# Altium PCB 12v to 5v_Regulator.PcbDoc
Units mil, origin at the board's own origin, x right, y up, seen from the top; angles counter-clockwise.
Board outline 1438.59 x 926.78 mil, 2 copper layers (Top Layer, Bottom Layer); 5 components, 3 nets, 17 pads, 4 vias.
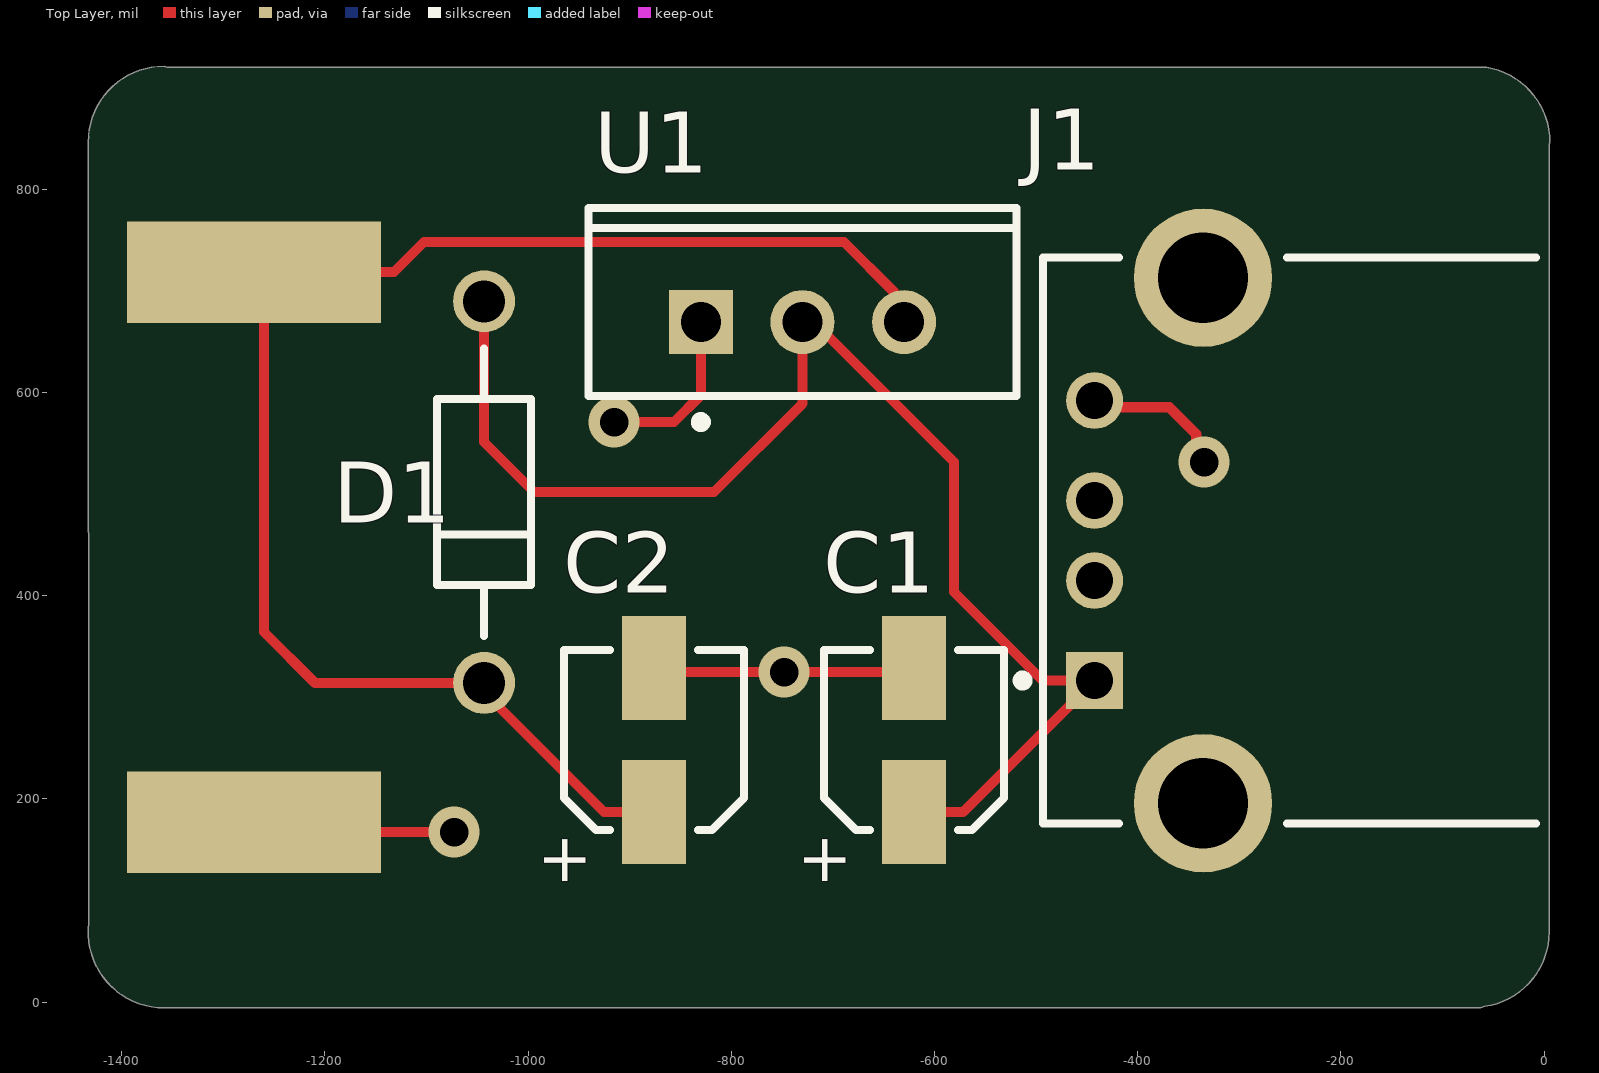
[diagram p0: Top Layer view]
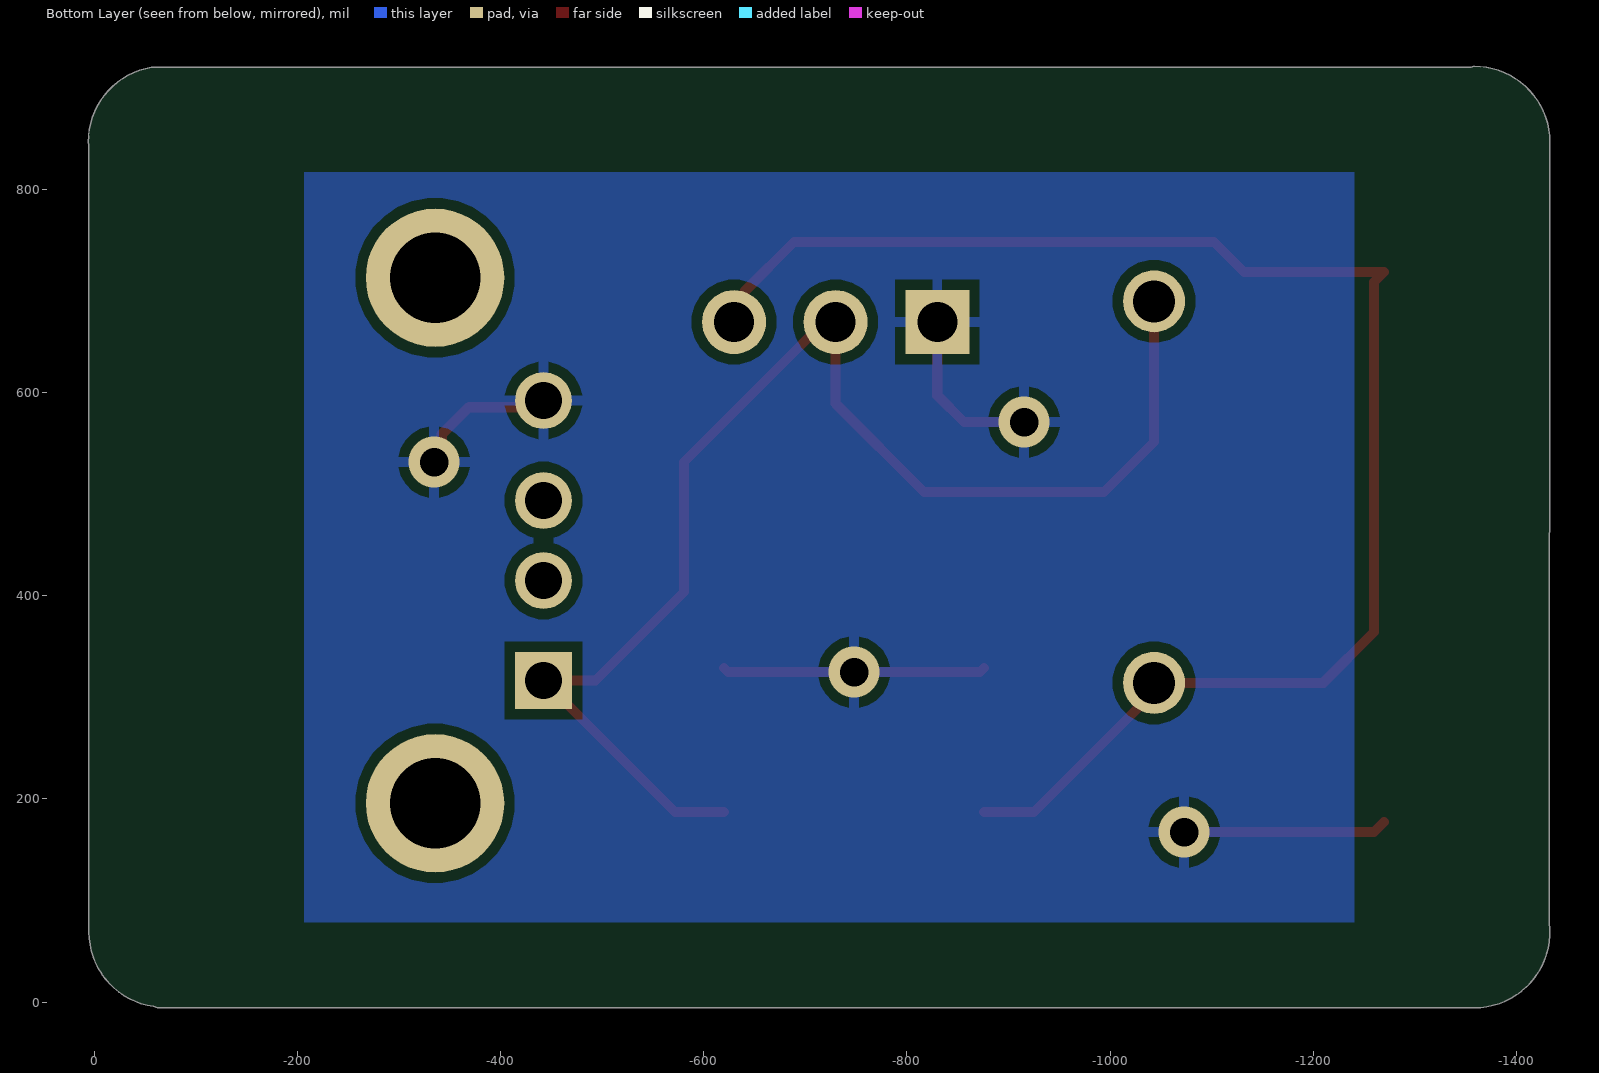
[diagram p1: Bottom Layer view, seen from below]

## Layer stack, top to bottom
Top Solder: solder mask 0.4, Solder Resist, Dk 3.5
Top Layer: signal copper 1.4
Dielectric 1: dielectric 12.6, FR-4, Dk 4.8
Bottom Layer: signal copper 1.4
Bottom Solder: solder mask 0.4, Solder Resist, Dk 3.5

## Board outline
-1432.31,78.11 ccw(c-1358.27,68.9) -1358.27,-5.71 -62.51,-5.71 -58.44,-4.27 ccw(c-68.9,68.9) 5.02,68.9 5.02,843.9 5.71,846.46 ccw(c-68.9,846.46) -56.63,920.05 -57.46,920.12 -1355.33,920.12 -1358.27,921.07 ccw(c-1358.27,846.46) -1432.88,846.46

## Design rules (kind name [scope] priority, off if disabled: settings)
Clearance Clearance_3 [All] p1: gap=5 ignorepadtopadclearanceinfootprint=FALSE
Clearance Clearance_2 [All] p2: gap=5 ignorepadtopadclearanceinfootprint=FALSE
Clearance Clearance_1 [All] p3: gap=5 ignorepadtopadclearanceinfootprint=FALSE
Clearance [All] p4: gap=5 ignorepadtopadclearanceinfootprint=FALSE
PolygonConnect [All] p1: connectstyle=Relief reliefconductorwidth=10 reliefentries=4 polygonreliefangle="90 Angle" airgapwidth=10
RoutingVias [All] p1: holewidth=28 width=50 viastyle="Through Hole" minholewidth=28 minwidth=50 maxholewidth=28 maxwidth=50
SilkToSolderMaskClearance [IsPad] p1 off: minsilkscreentomaskgap=10 clearancetoexposedcopper=TRUE
SolderMaskExpansion [All] p1: expansion=4 istentingtop=FALSE
SupplyNets "Schematic Supply Nets_2" [InNet('+12')] p1: voltage=0.000
SupplyNets "Schematic Supply Nets_1" [InNet('+5')] p2: voltage=0.000
SupplyNets "Schematic Supply Nets" [InNet('GND')] p3: voltage=0.000
UnRoutedNet [All] p1: checkbadconnections=TRUE
Width [All] p1: maxlimit=10 minlimit=10 preferedwidth=10
27 further rules are at their usual default settings.

## Components (designator, comment, footprint, x,y, rotation, side; value= is the part's Value field where it differs from the comment)
C1 "10uF" WCAP-ASLI_D4H5.5 49379.92,-49742.13 r270 top
C2 "10uF" WCAP-ASLI_D4H5.5 49124.02,-49742.13 r270 top
D1 "1N4002RLG" ONSC-AXIAL_LEAD-2-59-10_P -1043.31,501.97 r90 top
J1 "USB1130-15-A" FP-USB1130-15-A-MFG -209.69,454.25 r90 top
U1 "LM1085IT-5.0/NOPB" NDE0003A -729.92,669.29 r0 top

## Footprints (in the part's own frame and the unit in brackets; to place one, negate y for a bottom-side part, rotate by r counter-clockwise, add the part's x,y. Pads: shape width x height; smd on the part's side, far side on the other; paste and mask are expansions set on the pad)
FP-USB1130-15-A-MFG [mm]
  rect 1.42x1.42 hole 0.92 paste-2539.97 mask+0: 1(-3.5,5.91)
  round 1.42 hole 0.92 paste-2539.97 mask+0: 2(-1,5.91) 3(1,5.91) 4(3.5,5.91)
  round 3.46 hole 2.26 paste-2539.97 mask+0: 5(-6.57,3.2) 6(6.57,3.2)
  silkscreen extent -7.07,-5.13 7.07,7.83, body extent -8.4,-7.3 8.4,7.3, height 0.25
NDE0003A [mm] "FM, 3-Leads, Body 10.7x4.7mm, Pitch 2.54mm"
  rect 1.6x1.6 hole 1: 1(-2.54,0)
  round 1.6 hole 1: 2(0,0) 3(2.54,0)
  silkscreen extent -5.35,-2.62 5.35,2.85, body extent -5.4,-1.9 5.4,2.9, height 19.4
ONSC-AXIAL_LEAD-2-59-10_P [mm] "AXIAL, 2-Leads, Diameter 2.35mm"
  round 1.55 hole 1.05: 1(-4.77,0) 2(4.77,0)
  silkscreen extent -3.59,-1.17 3.59,1.17
WCAP-ASLI_D4H5.5 [mm] "Aluminium Electrolytic V-Chip SMT Capacitors, 4x5.5mm"
  rect 2.6x1.6 smd: 1(-1268.2,-1270) 2(-1271.8,-1270)
  silkscreen extent -1272.25,-1272.25 -1267.75,-1267.75, body extent -1272.5,-1272.15 -1267.5,-1267.85, height 5.5

## Part data
C1 C2: library part CMP-03913-53914566-2, "WCAP-ASLI Aluminum Electrolytic Capacitors", Capacitance=10µF, Case/Package=Radial, ESR (Equivalent Series Resistance)=1.66693Ω, Insulation Resistance=5.33333MΩ, Leakage Current=3µA, Max Operating Temperature=105°C, Min Operating Temperature=-55°C, Ripple Current=80mA, Tolerance=20%, Voltage Rating=16V, Diameter=4mm, Height=5.5mm, Height - Seated (Max)=5.5118mm, Impedance=2.2Ω, Lead Free="Lead Free", Length=5.5mm, Life (Hours)=2000hours, Mount="Surface Mount", Polarity=Polar, REACH SVHC=Unknown, Ripple Current (AC)=80mA, RoHS=Compliant, Voltage Rating (DC)=16V, Width=4.3mm
D1: library part CMP-0902-00183-1, "Standard Recovery Rectifier, 2-Pin Axial_Lead, Pb-Free, Tape and Reel", Manufacturer="On Semiconductor", ComponentLink1Description="Manufacturer URL", ComponentLink1URL=http://www.onsemi.com/, ComponentLink2Description=Datasheet, ComponentLink2URL=http://www.onsemi.com/pub_link/Collateral/1N4001-D.PDF, ComponentLink3Description="Package Specification", ComponentLink3URL=http://www.onsemi.cn/pub_link/Collateral/59-10.PDF, DatasheetVersion="Rev. 13", IFSM Max (A)=30, IO(rec) Max (A)=1, Mounting Technology="Through Hole", PackageDescription="2-Pin, Axial Lead, Diameter 2.35 mm", PackageReference=AXIAL_LEAD-2-59-10, PackageVersion="Rev. U, 02/2005", Packing="Tape and Reel", PartNumber=1N4002RLG, RoHS=TRUE, Type="Standard Recovery", VRRM Max (V)=100
J1: library part CMP-03329-113685452-1, "USB1130-15-A USB Connectors USB A 2.0 Skt RA High Life 15u T Hole W/Shell Stake T & R", Current Rating=3A, Max Operating Temperature=85°C, Min Operating Temperature=-40°C, Voltage Rating=30V, Contact Material="Gold, Nickel", Height=7.24mm, NexarPartId=113685452, Number of Contacts=4, USB Standard="USB 2.0"
U1: library part CMP-0062-02541-3, "3A Low Dropout Positive Regulators, 3-pin TO-220, Pb-Free", Manufacturer="Texas Instruments", PackageTopMarking=NSUZXYTTE#*LM1085*IT-5.0, PowerWise=N, ComponentLink1Description="Datasheet URL", ComponentLink1URL=http://www.ti.com/general/docs/lit/getliterature.tsp?genericPartNumber=LM1085&fileType=pdf, CompType="LDO IC", PackageDescription="TO-220, Molded, 3 Lead, Straight", PackageReference=NDE0003A, PinCount=3, RoHS=Y

## Free pads (board coordinates)
  rect 250x100 smd: 1(-1269.69,718.5) 2(-1269.69,177.17)

## Via types
v1: diameter 50/50 (per signal layer), hole 28, Top Layer to Bottom Layer, 2 vias
v2: diameter 50, hole 28, Top Layer to Bottom Layer, 1 vias
v3: diameter 50, hole 28, Top Layer to Bottom Layer, tented top, 1 vias

## Nets (pads, with @x,y where several pads share a name; then routed paths per layer and width w, separated by ;. In a path a pad name is that pad's centre, name@x,y a point inside that pad or via, vN(x,y) a via of type N, cw(c..) or ccw(c..) an arc to the next point about the centre after c; other vN are vias at no path point)
+5: C1.1 D1.2 J1.1 U1.2 | length 1328.7
  Top Layer w10: D1.2 -1043.31,551.18 -994.09,501.97 -816.93,501.97 -729.92,588.98 U1.2 -718.5,669.29 -580.71,531.5 -580.71,403.54 -493.62,316.46 J1.1 -571.81,187.01 C1.1
+12: C2.1 D1.1 pad.1 U1.3 | length 1517.1
  Top Layer w10: C2.1 -925.2,187.01 -1043.31,305.12 D1.1 -1209.84,314.17 -1259.84,364.17 -1259.84,708.66 pad.1 -1131.89,718.5 -1102.36,748.03 -688.98,748.03 -640.06,699.12 -640.06,679.43 U1.3
GND: C1.2 C2.2 J1.4 pad.2 U1.1 | length 772.8
  Top Layer w10: pad.2 -1259.84,167.32 v1(-1072.83,167.32) ; v1(-915.35,570.87) -856.3,570.87 -829.92,597.24 U1.1 ; C2.2 -872.05,324.8 v3(-748.03,324.8) -624.02,324.8 C1.2 ; J1.4 -435.75,585.44 -368.9,585.44 -342.3,558.83 -342.3,539.15 v2(-334.65,531.5)
pads on no net: J1.2 J1.3 J1.5 J1.6

## Polygon pours and split planes (outlines as drawn)
GND on Bottom Layer "GND_L02_P001" (solid, pour order 1): -1240.16,816.93 -1240.16,78.74 -206.69,78.74 -206.69,816.93

## Silkscreen, mask and mechanical layers (free items; w line width, h text height)
Mechanical 1:
  lines w10: -1427.86,80.43 ccw(c-1425.48,80.43) -1427.17,78.74 ccw(c-1358.27,68.9) -1358.27,-0.7 -62.51,-0.7 ccw(c-62.51,4.05) -59.15,0.69 ccw(c-68.9,68.9) 0,68.9 0,844.77 cw(c2.39,844.77) 0.7,846.46 ccw(c-68.9,846.46) -57.46,915.11 -1355.98,915.11 cw(c-1355.98,918.34) -1358.27,916.05 ccw(c-1358.27,846.46) -1427.86,846.46 -1427.86,80.43

## Text inside footprints (layer, text, board x,y; h text height)
C1: Top Overlay "+" at -728.35,167.32 h48 r270
C2: Top Overlay "+" at -984.25,167.32 h48 r270